# Altium PCB DSV1-002（电池保护板） REV0.2 20230331.PcbDoc (part 2 of 2)
Units mm, origin at the board's own origin, x right, y up, seen from the top; angles counter-clockwise.
Board outline 35.24 x 36.91 mm, 2 copper layers (TOP, BOTTOM), stack 0.264 mm thick; 97 components, 56 nets, 257 pads, 145 vias.
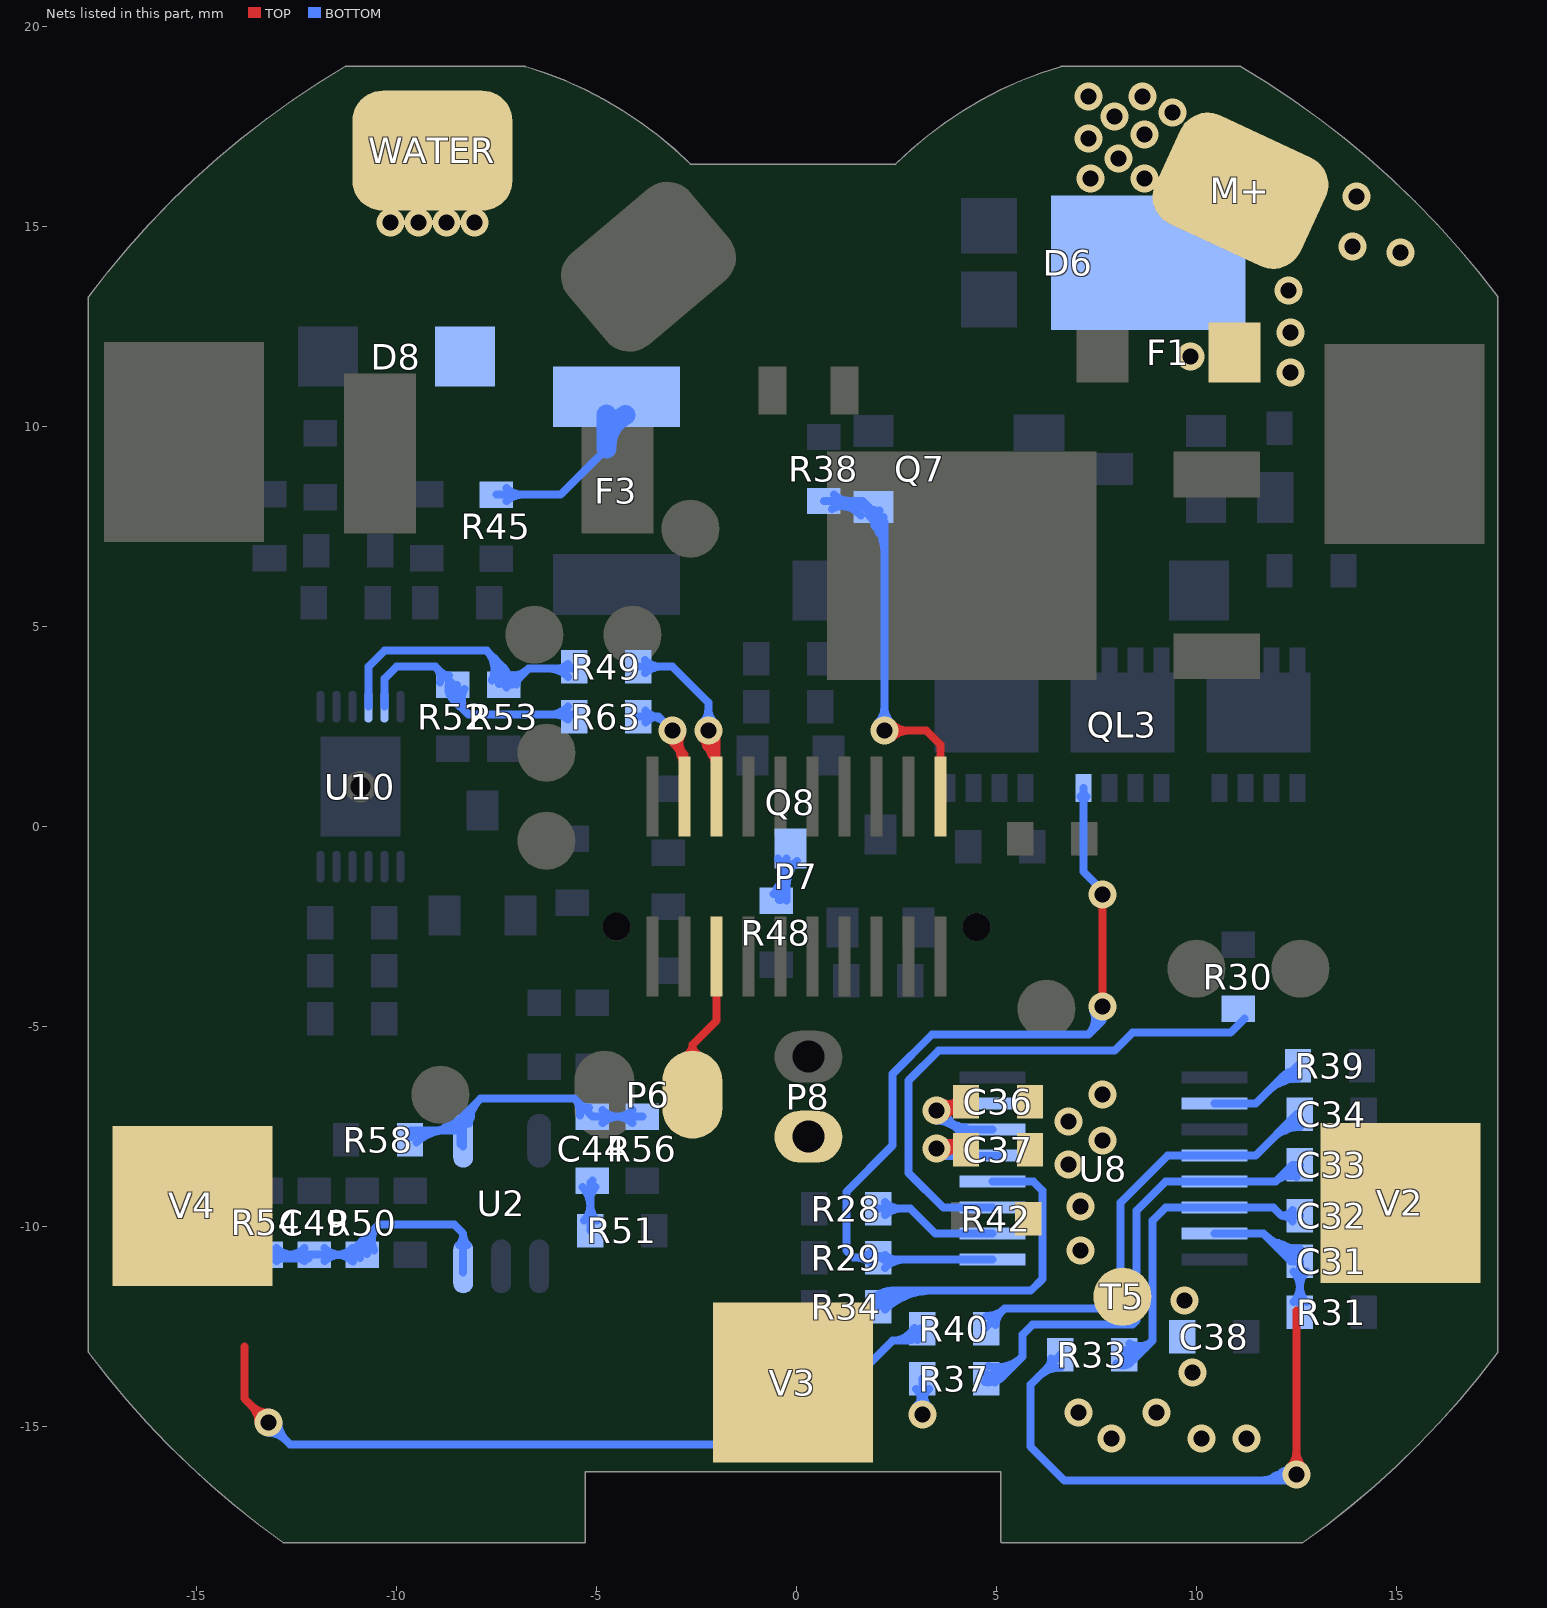
[diagram p2: the nets of this part, all layers, seen from the top]

## Via types
v1: diameter 0.7, hole 0.4, TOP to BOTTOM, tented both sides, 145 vias

## Nets (pads, with @x,y where several pads share a name; then routed paths per layer and width w, separated by ;. In a path a pad name is that pad's centre, name@x,y a point inside that pad or via, vN(x,y) a via of type N, cw(c..) or ccw(c..) an arc to the next point about the centre after c; other vN are vias at no path point) (continued)
N1343729: Q8.3 R48.1 | length 8
  BOTTOM w0.2: -0.463,-1.495 ccw(c-0.245,-1.622) R48.1@-0.393,-1.826 ; Q8.3@-0.46,-0.8 cw(c-1.14,-1.192) -0.381,-1.396 ; -0.359,-1.313 cw(c0.282,-1.484) Q8.3@-0.05,-0.91 ; -0.352,-1.303 ccw(c-0.113,-1.441) R48.1@-0.275,-1.664 ; R48.1@-0.25,-1.85 Q8.3@-0.25,-0.8 ; R48.1@-0.574,-1.687 ccw(c-1.356,-0.905) -0.25,-0.905 cw(c-1.356,-0.905) R48.1@-0.574,-1.687 ; R48.1@-0.432,-1.829 ccw(c-0.873,-1.388) -0.25,-1.388 cw(c-0.873,-1.388) R48.1@-0.432,-1.829 ; Q8.3@-0.412,-0.862 cw(c-0.804,-1.254) -0.25,-1.254 ccw(c-0.804,-1.254) Q8.3@-0.412,-0.862 ; -0.25,-1.495 cw(c0.645,-1.495) 0.012,-0.862 ccw(c0.645,-1.495) -0.25,-1.495
N1459266: C44.1 R56.1 R58.2 U2.4 | length 18.9
  BOTTOM w0.2: R58.2@-9.631,-7.6 -8.4,-7.6 -8.4,-7.929 -8.33,-7.999 -8.33,-7.23 -7.9,-6.8 -5.55,-6.8 ; -8.796,-7.525 cw(c-8.623,-7.826) U2.4@-8.419,-7.545 ; U2.4@-8.305,-7.467 ccw(c-8.492,-7.143) -8.131,-7.24 ; R56.1@-3.85,-7.25 C44.1@-5.1,-7.25 -5.55,-6.8 ; -5.55,-6.8 cw(c-5.888,-7.138) -5.416,-7.213 ccw(c-5.888,-7.138) -5.55,-6.8 ; -4.495,-7.25 cw(c-4.495,-7.806) -4.102,-7.413 ccw(c-4.495,-7.806) -4.495,-7.25 ; -4.495,-7.25 ccw(c-4.495,-6.694) -4.102,-7.087 cw(c-4.495,-6.694) -4.495,-7.25 ; -4.455,-7.25 cw(c-4.455,-6.694) -4.848,-7.087 ccw(c-4.455,-6.694) -4.455,-7.25 ; -4.455,-7.25 ccw(c-4.455,-7.806) -4.848,-7.413 cw(c-4.455,-7.806) -4.455,-7.25 ; R58.2@-9.64,-7.752 cw(c-9.272,-8.121) -9.272,-7.6 ccw(c-9.272,-8.121) R58.2@-9.64,-7.752 ; R58.2@-9.498,-7.894 cw(c-8.789,-8.603) -8.789,-7.6 ccw(c-8.789,-8.603) R58.2@-9.498,-7.894 ; -9.118,-7.6 ccw(c-9.118,-6.636) -8.436,-7.318 cw(c-9.118,-6.636) -9.118,-7.6 ; -8.635,-7.6 ccw(c-8.635,-7.119) -8.295,-7.459 cw(c-8.635,-7.119) -8.635,-7.6 ; U2.4@-8.18,-7.424 cw(c-7.351,-7.424) -7.938,-6.838 ccw(c-7.351,-7.424) U2.4@-8.18,-7.424 ; C44.1@-5.43,-6.92 ccw(c-5.189,-6.679) -5.189,-7.02 cw(c-5.189,-6.679) C44.1@-5.43,-6.92
N1459278: C49.1 R50.2 R54.2 U2.3 | length 24
  BOTTOM w0.2: R54.2@-13.4,-10.8 C49.1@-12.2,-10.8 ; R54.2@-13.25,-10.7 C49.1@-12.05,-10.7 -11,-10.7 -11.2,-10.7 -10.45,-9.95 ; R54.2@-12.939,-10.639 ccw(c-12.787,-10.597) -12.747,-10.749 ; U2.3@-8.33,-11.139 -8.33,-10.17 -8.55,-9.95 -10.1,-9.95 -10.45,-9.95 ; R54.2@-12.998,-10.537 ccw(c-12.605,-10.144) -12.605,-10.7 ; R54.2@-12.998,-10.537 ccw(c-12.364,-9.903) -12.364,-10.8 cw(c-12.364,-9.903) R54.2@-12.998,-10.537 ; R54.2@-12.998,-10.537 ccw(c-12.605,-10.144) -12.605,-10.7 ; -12.695,-10.7 cw(c-12.695,-11.256) -12.302,-10.863 ccw(c-12.695,-11.256) -12.695,-10.7 ; -12.695,-10.7 ccw(c-12.695,-10.144) C49.1@-12.302,-10.537 ; -12.695,-10.7 ccw(c-12.695,-10.144) C49.1@-12.302,-10.537 ; -12.605,-10.7 ccw(c-12.605,-11.256) -12.998,-10.863 cw(c-12.605,-11.256) -12.605,-10.7 ; -12.553,-10.749 ccw(c-12.513,-10.597) C49.1@-12.361,-10.639 ; -12.553,-10.749 ccw(c-12.513,-10.597) C49.1@-12.361,-10.639 ; -12.553,-10.749 ccw(c-12.513,-10.597) C49.1@-12.361,-10.639 ; C49.1@-12.302,-10.537 cw(c-12.936,-9.903) -12.936,-10.8 ccw(c-12.936,-9.903) C49.1@-12.302,-10.537 ; -11.495,-10.7 cw(c-11.495,-11.256) -11.102,-10.863 ccw(c-11.495,-11.256) -11.495,-10.7 ; -11.495,-10.7 ccw(c-11.495,-10.144) -11.102,-10.537 cw(c-11.495,-10.144) -11.495,-10.7 ; -11.405,-10.7 cw(c-11.405,-10.144) -11.798,-10.537 ccw(c-11.405,-10.144) -11.405,-10.7 ; -11.405,-10.7 ccw(c-11.405,-11.256) -11.798,-10.863 cw(c-11.405,-11.256) -11.405,-10.7 ; -10.45,-9.95 ccw(c-10.053,-10.347) -10.555,-10.597 cw(c-10.053,-10.347) -10.45,-9.95 ; -8.33,-10.202 cw(c-8.693,-10.202) -8.436,-10.458 ccw(c-8.693,-10.202) -8.33,-10.202 ; -8.33,-10.202 ccw(c-7.968,-10.202) -8.224,-10.458 cw(c-7.968,-10.202) -8.33,-10.202 ; R50.2@-11.092,-10.865 cw(c-10.839,-10.739) -11.039,-10.539 ccw(c-10.839,-10.739) R50.2@-11.092,-10.865 ; R50.2@-10.913,-10.776 cw(c-10.577,-10.608) -10.843,-10.343 ccw(c-10.577,-10.608) R50.2@-10.913,-10.776 ; R50.2@-10.734,-10.687 cw(c-10.315,-10.477) -10.646,-10.146 ccw(c-10.315,-10.477) R50.2@-10.734,-10.687
N1460629: C44.2 R51.1 | length 4.8
  BOTTOM w0.2: R51.1@-5.15,-10.1 -5.15,-8.9 C44.2@-5.1,-8.85 ; -5.15,-9.455 cw(c-5.706,-9.455) -5.313,-9.848 ccw(c-5.706,-9.455) -5.15,-9.455 ; -5.15,-9.455 ccw(c-4.594,-9.455) -4.987,-9.848 cw(c-4.594,-9.455) -5.15,-9.455 ; C44.2@-5.352,-9.013 cw(c-5.839,-9.5) -5.15,-9.5 ccw(c-5.839,-9.5) C44.2@-5.352,-9.013 ; -5.15,-9.312 cw(c-4.727,-9.312) -5.026,-9.013 ccw(c-4.727,-9.312) -5.15,-9.312
NTC2: P6.2 P7.18 | length 4.9
  TOP w0.2: P6.2@-2.6,-6.45 -2.6,-5.45 ; P7.18@-2,-3.25 -2,-4.85 -2.6,-5.45 ; -2.6,-5.45 cw(c-2.898,-5.45) -2.804,-5.733 ccw(c-2.898,-5.45) -2.6,-5.45 ; -2.6,-5.45 ccw(c-2.302,-5.45) -2.396,-5.733 cw(c-2.302,-5.45) -2.6,-5.45
OUT: D6.2 F1.1 M+.1
  other v1: 12.35,11.35 9.85,11.75 12.35,12.35 12.3,13.4 15.1,14.35 13.9,14.5 14,15.75 7.35,16.2 8.7,16.2 8.05,16.7 7.3,17.2 8.7,17.3 7.95,17.75 9.4,17.85 7.3,18.25 8.65,18.25
"PWM MOTO": P7.1 Q7.1 R38.1 | length 24
  TOP w0.2: v1(2.2,2.4) 3.25,2.4 3.6,2.05 P7.1@3.6,0.75 ; 2.804,2.4 cw(c2.804,3.004) 2.377,2.577 ccw(c2.804,3.004) 2.804,2.4 ; 2.804,2.4 ccw(c2.804,1.796) 2.377,2.223 cw(c2.804,1.796) 2.804,2.4
  BOTTOM w0.2: R38.1@0.685,8.144 1.656,8.144 2.2,7.6 v1(2.2,2.4) ; R38.1@0.889,7.945 cw(c1.15,7.492) 1.286,7.997 ; R38.1@0.973,8.259 ccw(c1.483,8.553) 1.331,7.985 ; 1.97,7.507 cw(c2.225,7.654) Q7.1@2.074,7.908 ; Q7.1@1.986,7.696 cw(c1.961,7.487) 2.143,7.592 cw(c2.237,7.646) Q7.1@2.18,7.738 ; 2.071,7.331 cw(c2.329,7.48) Q7.1@2.177,7.736 ; 1.33,8.144 cw(c1.33,8.7) 0.937,8.307 ccw(c1.33,8.7) 1.33,8.144 ; 1.33,8.144 ccw(c1.33,7.588) 0.937,7.981 cw(c1.33,7.588) 1.33,8.144 ; 2.2,3.004 cw(c1.596,3.004) 2.023,2.577 ccw(c1.596,3.004) 2.2,3.004 ; 2.2,3.004 ccw(c2.804,3.004) 2.377,2.577 cw(c2.804,3.004) 2.2,3.004 ; R38.1@0.737,8.144 cw(c0.737,6.908) 1.611,7.782 ccw(c0.737,6.908) R38.1@0.737,8.144 ; 1.219,8.144 cw(c1.219,7.39) 1.752,7.923 ccw(c1.219,7.39) 1.219,8.144 ; Q7.1@1.811,7.782 cw(c0.871,6.842) 2.2,6.842 ccw(c0.871,6.842) Q7.1@1.811,7.782 ; Q7.1@1.952,7.923 cw(c1.354,7.325) 2.2,7.325 ccw(c1.354,7.325) Q7.1@1.952,7.923
SCL: R52.2 R63.1 U10.11 | length 13.6
  BOTTOM w0.2: U10.11@-10.3,3 -10.3,3.7 -10,4 -9.024,4 ; R63.1@-5.6,2.8 -8.2,2.8 ; -9.024,4 cw(c-9.326,3.698) -8.91,3.604 ccw(c-9.326,3.698) -9.024,4 ; -9.024,4 -8.597,3.572 R52.2@-8.597,3.553 -8.597,3.197 ; -8.597,3.197 cw(c-8.436,3.197) -8.502,3.343 ccw(c-8.436,3.197) -8.597,3.197 ; -8.597,3.197 ccw(c-8.757,3.197) -8.691,3.343 cw(c-8.757,3.197) -8.597,3.197 ; -8.597,3.197 -8.2,2.8 ; -8.2,2.8 cw(c-7.805,3.195) -8.303,3.448 ccw(c-7.805,3.195) -8.2,2.8 ; R52.2@-8.894,3.869 ccw(c-8.686,4.078) -8.686,3.783 cw(c-8.686,4.078) R52.2@-8.894,3.869 ; R52.2@-8.659,3.63 ccw(c-8.321,3.458) -8.589,3.189 cw(c-8.321,3.458) R52.2@-8.659,3.63 ; R52.2@-8.481,3.539 ccw(c-8.063,3.326) -8.395,2.995 cw(c-8.063,3.326) R52.2@-8.481,3.539 ; -6.2,2.8 ccw(c-6.2,3.489) -5.713,3.002 cw(c-6.2,3.489) -6.2,2.8 ; -6.012,2.8 cw(c-6.012,2.377) -5.713,2.676 ccw(c-6.012,2.377) -6.012,2.8
SCL_: P7.9 R63.2 | length 7
  TOP w0.2: v1@-3.1,2.1 -2.8,1.8 ; -2.908,1.817 ccw(c-2.632,1.891) P7.9@-2.775,1.643 ; P7.9@-2.8,0.75 -2.8,1.8 ; -2.8,1.8 cw(c-2.504,2.096) -2.877,2.287 ccw(c-2.504,2.096) -2.8,1.8 ; v1@-3.055,2.377 ccw(c-2.762,2.228) -2.995,1.995 cw(c-2.762,2.228) v1@-3.055,2.377 ; -3.027,2.027 cw(c-3.454,1.6) -2.85,1.6 ccw(c-3.454,1.6) -3.027,2.027
  BOTTOM w0.2: R63.2@-3.95,2.75 -3.45,2.75 ; -3.45,2.7 -3.4,2.7 v1(-3.1,2.4) ; -3.45,2.75 cw(c-3.45,3.178) -3.775,2.9 ccw(c-3.45,3.178) -3.45,2.75 ; -3.45,2.75 ccw(c-3.45,2.322) -3.775,2.6 cw(c-3.45,2.322) -3.45,2.75
SDA: R49.1 R53.2 U10.10 | length 15.5
  BOTTOM w0.2: U10.10@-10.7,3 -10.7,4 -10.3,4.4 -7.742,4.4 ; R49.1@-5.55,3.95 -6.7,3.95 ; -7.742,4.4 cw(c-8.208,3.935) -7.613,3.652 ccw(c-8.208,3.935) -7.742,4.4 ; -7.742,4.4 -7.317,3.974 ; -7.317,3.974 cw(c-7.587,3.974) -7.441,3.747 ccw(c-7.587,3.974) -7.317,3.974 ; -7.317,3.974 ccw(c-7.046,3.974) -7.192,3.747 cw(c-7.046,3.974) -7.317,3.974 ; -7.317,3.974 R53.2@-7.317,3.553 -7.097,3.553 -6.7,3.95 ; -6.7,3.95 cw(c-7.12,4.37) -7.198,3.781 ccw(c-7.12,4.37) -6.7,3.95 ; -7.542,4.2 cw(c-7.936,3.805) -7.433,3.566 ccw(c-7.936,3.805) -7.542,4.2 ; -7.342,3.999 cw(c-7.665,3.676) -7.252,3.48 ccw(c-7.665,3.676) -7.342,3.999 ; R53.2@-6.998,3.553 cw(c-6.757,3.553) -6.927,3.723 ccw(c-6.757,3.553) R53.2@-6.998,3.553 ; -6.2,3.95 cw(c-6.2,3.261) -5.713,3.748 ccw(c-6.2,3.261) -6.2,3.95 ; -6.012,3.95 ccw(c-6.012,4.373) -5.713,4.074 cw(c-6.012,4.373) -6.012,3.95
SDA_: P7.8 R49.2 | length 12.4
  TOP w0.2: -2.234,1.976 cw(c-1.968,2.129) v1@-2.168,2.362 ; v1@-2.229,2.152 cw(c-2.257,1.904) -2.041,2.029 cw(c-1.895,2.113) v1@-2.018,2.229 ; -2.149,1.87 ccw(c-1.788,1.967) P7.8@-1.975,1.643 ; -2.114,1.767 cw(c-1.809,1.943) v1@-2.038,2.21 ; P7.8@-2,0.75 v1@-2,2.2 ; v1@-2.377,2.223 cw(c-3.286,1.314) -2,1.314 ccw(c-3.286,1.314) v1@-2.377,2.223 ; v1@-2.235,2.365 cw(c-2.804,1.796) -2,1.796 ccw(c-2.804,1.796) v1@-2.235,2.365
  BOTTOM w0.2: R49.2@-3.95,4 -3.1,4 -2.2,3.1 v1@-2.2,2.6 ; -3.394,4 cw(c-3.394,4.556) -3.787,4.163 ccw(c-3.394,4.556) -3.394,4 ; -3.394,4 ccw(c-3.394,3.444) -3.787,3.837 cw(c-3.394,3.444) -3.394,4 ; -2.2,2.95 cw(c-2.68,2.95) -2.364,2.588 ccw(c-2.68,2.95) -2.2,2.95 ; -2.2,2.95 ccw(c-1.72,2.95) -2.036,2.588 cw(c-1.72,2.95) -2.2,2.95
  other v1: -2.2,2.4
U8_CCT: C36.1 U8.6 | length 11.3
  TOP w0.2: v1@3.5,-7 C36.1@4.2,-7 ; v1@3.698,-6.948 ccw(c4.002,-6.714) 4.002,-7.097 ccw(c4.002,-7.471) v1@3.701,-7.249 ; C36.1@4.014,-6.911 cw(c3.775,-6.861) 3.838,-7.097 cw(c3.92,-7.402) C36.1@4.105,-7.146 ; v1@3.625,-6.883 ccw(c3.799,-6.582) 3.889,-6.918 ; v1@3.625,-6.883 ccw(c3.799,-6.582) 3.889,-6.918 ; v1@3.625,-6.883 ccw(c3.799,-6.582) 3.889,-6.918 ; C36.1@4.2,-7 ccw(c4.2,-7.625) 3.7,-7.25 cw(c4.2,-7.625) C36.1@4.2,-7 ; v1@3.584,-7 ccw(c3.584,-6.304) 4.076,-6.796 cw(c3.584,-6.304) v1@3.584,-7 ; v1@3.677,-6.923 ccw(c3.862,-6.738) 3.862,-7 cw(c3.862,-6.738) v1@3.677,-6.923 ; v1@3.782,-7 cw(c3.782,-7.415) 4.076,-7.122 ccw(c3.782,-7.415) v1@3.782,-7
  BOTTOM w0.2: v1@3.485,-7.016 4.044,-7.575 ; v1@3.548,-7.086 ccw(c4.089,-6.922) 3.943,-7.468 ; 4.003,-7.467 cw(c3.929,-7.743) U8.6@4.177,-7.6 ; U8.6@4.895,-7.575 4.044,-7.575 ; 4.044,-7.575 ccw(c3.501,-8.118) 3.5,-7.35 cw(c3.501,-8.118) 4.044,-7.575 ; v1@3.75,-7.1 ccw(c4.187,-7.1) 3.878,-7.409 cw(c4.187,-7.1) v1@3.75,-7.1 ; 3.834,-7.365 ccw(c4.22,-6.979) 4.22,-7.525 cw(c4.22,-6.979) 3.834,-7.365
  other v1: 3.5,-7.1
U8_CDT: C37.1 U8.5 | length 13.2
  TOP w0.2: v1@3.5,-8 C37.1@4.3,-8 ; v1@3.776,-7.911 cw(c3.776,-8.188) C37.1@4.029,-8.075 ; 3.852,-7.911 ccw(c3.852,-7.594) C37.1@4.076,-7.818 ; v1@3.65,-7.85 ccw(c3.873,-7.552) C37.1@3.969,-7.911 ; v1@3.65,-7.85 ccw(c3.873,-7.552) C37.1@3.969,-7.911 ; v1@3.65,-7.85 ccw(c3.873,-7.552) C37.1@3.969,-7.911 ; v1@3.737,-8.129 cw(c4.056,-8.236) C37.1@3.969,-7.911 ; v1@3.737,-8.129 cw(c4.056,-8.236) C37.1@3.969,-7.911 ; v1@3.737,-8.129 cw(c4.056,-8.236) C37.1@3.969,-7.911 ; C37.1@4.076,-7.818 cw(c3.638,-7.38) 3.638,-8 ccw(c3.638,-7.38) C37.1@4.076,-7.818 ; v1@3.677,-8.227 cw(c4.224,-8.774) 4.224,-8 ccw(c4.224,-8.774) v1@3.677,-8.227 ; v1@3.677,-7.873 ccw(c3.983,-7.567) 3.983,-8 cw(c3.983,-7.567) v1@3.677,-7.873 ; v1@3.729,-8 cw(c3.729,-8.491) 4.076,-8.144 ccw(c3.729,-8.491) v1@3.729,-8
  BOTTOM w0.2: v1@3.5,-8 3.728,-8.228 U8.5@5.04,-8.228 ; v1@3.54,-8.08 cw(c3.765,-8.247) 3.904,-8.005 ; v1@3.689,-8.214 cw(c3.778,-8.292) 3.838,-8.189 cw(c3.926,-8.037) v1@3.75,-8.042 ; v1@3.701,-8.199 cw(c3.946,-8.382) U8.5@4.099,-8.117 ; 3.941,-8.069 cw(c3.841,-8.444) U8.5@4.177,-8.25 ; v1@3.535,-8.015 ccw(c4.05,-7.5) 4.05,-8.228 cw(c4.05,-7.5) v1@3.535,-8.015 ; v1@3.677,-7.873 ccw(c4.533,-7.017) 4.533,-8.228 cw(c4.533,-7.017) v1@3.677,-7.873
  other v1: 3.5,-8.05
U8_COP: QL3.G R29.2 U8.1 | length 23.7
  TOP w0.2: v1@7.65,-4.45 v1(7.65,-1.7)
  BOTTOM w0.2: R29.2@1.887,-10.938 ccw(c1.494,-11.331) 1.494,-10.775 ccw(c1.494,-10.219) R29.2@1.887,-10.612 ; R29.2@2.05,-10.775 1.425,-10.775 1.25,-10.6 1.25,-9.126 2.404,-7.972 2.404,-6.18 3.384,-5.2 7.3,-5.2 ; R29.2@2.087,-10.737 2.175,-10.825 U8.1@4.895,-10.825 ; R29.2@2.213,-11.027 cw(c2.7,-11.514) 2.7,-10.825 ; R29.2@2.213,-10.701 ccw(c2.512,-10.402) 2.512,-10.825 ; QL3.G@7.104,0.753 cw(c6.934,0.583) 7.175,0.583 cw(c7.416,0.583) QL3.G@7.246,0.753 ; QL3.G@7.175,0.974 7.175,-1.125 7.65,-1.6 v1(7.65,-1.7) ; v1@7.419,-4.596 cw(c6.909,-4.809) 7.3,-5.2 ; 7.511,-4.989 ccw(c7.207,-4.685) v1@7.604,-4.519 ; v1(7.65,-4.5) 7.65,-4.85 7.3,-5.2
U8_DOP: R30.2 U8.3 | length 13.8
  BOTTOM w0.2: U8.3@4.895,-9.525 3.675,-9.525 2.804,-8.654 2.804,-6.346 3.55,-5.6 7.95,-5.6 8.4,-5.15 10.85,-5.15 R30.2@11.2,-4.8
U8_SEL: R39.1 U8.10 | length 6.1
  BOTTOM w0.2: U8.10@10.445,-6.925 11.475,-6.925 12.15,-6.25 ; 12.068,-6.415 ccw(c11.89,-5.751) R39.1@12.512,-6.046 ; R39.1@12.539,-5.97 12.259,-6.25 12.15,-6.25 ; 12.15,-6.25 cw(c12.279,-6.379) 12.394,-6.237 ccw(c12.279,-6.379) 12.15,-6.25 ; 11.808,-6.592 cw(c12.539,-7.323) 12.539,-6.289 ccw(c12.539,-7.323) 11.808,-6.592 ; 12.15,-6.25 cw(c12.539,-6.64) 12.539,-6.089 ccw(c12.539,-6.64) 12.15,-6.25
U8_VC1: C31.2 R31.1 U8.15 | length 11.8
  BOTTOM w0.2: U8.15@10.445,-10.175 11.676,-10.175 ; 12.052,-10.409 cw(c11.84,-11.213) C31.2@12.559,-10.794 ; C31.2@12.366,-10.85 ccw(c12.05,-10.951) 12.134,-10.63 ccw(c12.244,-10.216) C31.2@12.466,-10.582 ; R31.1@12.585,-12.138 C31.2@12.585,-10.868 12.369,-10.868 11.676,-10.175 ; 11.676,-10.175 ccw(c12.579,-9.272) 12.584,-10.549 cw(c12.579,-9.272) 11.676,-10.175 ; 12.585,-11.513 cw(c13.141,-11.513) 12.748,-11.12 ccw(c13.141,-11.513) 12.585,-11.513 ; 12.585,-11.513 ccw(c12.029,-11.513) 12.422,-11.12 cw(c12.029,-11.513) 12.585,-11.513 ; 12.585,-11.493 cw(c12.029,-11.493) 12.422,-11.886 ccw(c12.029,-11.493) 12.585,-11.493 ; 12.585,-11.493 ccw(c13.141,-11.493) 12.748,-11.886 cw(c13.141,-11.493) 12.585,-11.493 ; 12.015,-10.514 ccw(c12.582,-9.948) 12.585,-10.749 cw(c12.582,-9.948) 12.015,-10.514
U8_VC2: C32.2 R33.1 U8.14 | length 10.9
  BOTTOM w0.2: R33.1@8.004,-13.425 ccw(c8.159,-13.176) R33.1@8.367,-13.383 ; R33.1@8.11,-13.255 ccw(c8.296,-12.957) 8.544,-13.206 ; R33.1@8.216,-13.085 ccw(c8.433,-12.738) 8.722,-13.028 ; R33.1@8.322,-12.916 ccw(c8.57,-12.52) 8.9,-12.85 ; R33.1@8.4,-13.35 8.9,-12.85 8.9,-9.85 9.225,-9.525 U8.14@10.445,-9.525 11.925,-9.525 12.125,-9.725 ; C32.2@12.585,-9.725 12.125,-9.725 ; 12.125,-9.725 cw(c12.125,-10.069) 12.401,-9.863 ccw(c12.125,-10.069) 12.125,-9.725 ; 12.125,-9.725 ccw(c12.125,-9.381) 12.401,-9.587 cw(c12.125,-9.381) 12.125,-9.725
U8_VC3: C33.2 R37.1 U8.13 | length 16.4
  BOTTOM w0.2: R37.1@4.71,-13.876 ccw(c4.819,-13.426) 5.146,-13.754 ; R37.1@4.75,-13.8 5.1,-13.8 ; R37.1@4.757,-13.682 ccw(c4.917,-13.021) 5.398,-13.502 ; R37.1@4.804,-13.487 ccw(c5.016,-12.616) 5.65,-13.25 ; R37.1@4.961,-13.891 cw(c5.1,-13.951) 5.1,-13.8 ; R37.1@4.961,-13.709 ccw(c5.1,-13.649) 5.1,-13.8 ; C33.2@12.585,-8.455 12.398,-8.455 11.978,-8.875 ; 5.1,-13.8 5.65,-13.25 ; 5.65,-13.25 5.65,-12.7 5.9,-12.45 8.4,-12.45 8.5,-12.35 8.5,-9.6 9.225,-8.875 U8.13@10.445,-8.875 11.978,-8.875 ; 11.978,-8.875 cw(c12.331,-9.228) 12.505,-8.76 ccw(c12.331,-9.228) 11.978,-8.875 ; 12.199,-8.654 cw(c12.451,-8.906) 12.575,-8.572 ccw(c12.451,-8.906) 12.199,-8.654
U8_VC4: C34.2 R40.1 U8.12 | length 15
  BOTTOM w0.2: R40.1@4.7,-12.55 5.2,-12.05 ; R40.1@4.754,-12.231 ccw(c4.763,-11.613) 5.2,-12.05 ; R40.1@4.98,-12.461 cw(c5.442,-12.461) 5.115,-12.135 ; 12.141,-7.623 ccw(c11.978,-7.014) C34.2@12.557,-7.262 ; C34.2@12.515,-7.185 11.475,-8.225 U8.12@10.445,-8.225 9.275,-8.225 8.1,-9.4 8.1,-11.75 7.8,-12.05 5.2,-12.05 ; 11.921,-7.779 cw(c12.585,-8.443) 12.585,-7.504 ccw(c12.585,-8.443) 11.921,-7.779 ; C34.2@12.262,-7.438 cw(c12.585,-7.761) 12.585,-7.304 ccw(c12.585,-7.761) C34.2@12.262,-7.438
U8_VMP: R28.2 U8.2 | length 4
  BOTTOM w0.2: R28.2@2.05,-9.55 2.85,-9.55 3.475,-10.175 U8.2@4.895,-10.175 ; R28.2@2.213,-9.713 cw(c2.606,-10.106) 2.606,-9.55 cw(c2.606,-8.994) R28.2@2.213,-9.387
U8_VNIN: R34.2 U8.4 | length 12.5
  BOTTOM w0.2: R34.2@1.93,-11.791 cw(c2.391,-12.252) 2.391,-11.6 ; R34.2@2.05,-12 2.45,-11.6 ; R34.2@2.05,-11.95 2.4,-11.6 ; R34.2@2.071,-11.932 cw(c2.874,-12.735) 2.874,-11.6 ; R34.2@2.101,-11.687 ccw(c2.172,-11.372) 2.4,-11.6 ; R34.2@2.111,-11.689 ccw(c2.204,-11.354) 2.45,-11.6 ; R34.2@2.213,-12.074 cw(c3.357,-13.218) 3.357,-11.6 ; R34.2@2.28,-11.911 cw(c2.621,-11.911) R34.2@2.38,-11.67 ; R34.2@2.28,-11.904 cw(c2.69,-11.89) 2.4,-11.6 ; U8.4@4.895,-8.875 5.925,-8.875 6.15,-9.1 6.15,-11.306 5.856,-11.6 2.45,-11.6 ; 2.4,-11.6 2.45,-11.6
U8_VSS: C36.2 C37.2 C38.2 P8.1 R42.1 T5.1 U8.7
  other v1: 7.875,-15.3 10.125,-15.3 11.25,-15.3 7.05,-14.65 9,-14.65 9.9,-13.65 9.7,-11.85 7.1,-10.6 7.1,-9.5 6.8,-8.45 7.65,-7.85 6.8,-7.375 7.65,-6.7
V2: R33.2 V2.1 | length 20.1
  TOP w0.2: v1(12.5,-16.2) 12.5,-12.1 ; 12.5,-15.596 cw(c11.896,-15.596) 12.323,-16.023 ccw(c11.896,-15.596) 12.5,-15.596 ; 12.5,-15.596 ccw(c13.104,-15.596) 12.677,-16.023 cw(c13.104,-15.596) 12.5,-15.596
  BOTTOM w0.2: 6.055,-13.745 cw(c6.6,-14.289) R33.2@6.6,-13.519 ; R33.2@6.27,-13.53 ccw(c6.029,-13.289) R33.2@6.37,-13.289 ; R33.2@6.6,-13.2 5.85,-13.95 5.85,-15.5 6.7,-16.35 12.35,-16.35 v1(12.5,-16.2) ; 11.944,-16.242 cw(c12.07,-16.461) v1@12.286,-16.33 ; 12.121,-16.14 cw(c12.245,-16.355) v1@12.457,-16.226 ; 11.534,-16.35 ccw(c11.534,-15.234) 12.323,-16.023 cw(c11.534,-15.234) 11.534,-16.35 ; 12.017,-16.35 ccw(c12.017,-15.717) 12.465,-16.165 cw(c12.017,-15.717) 12.017,-16.35
V3: R37.2 V3.1 | length 3.7
  BOTTOM w0.2: v1@2.973,-14.523 ccw(c2.546,-14.096) 3.15,-14.096 ccw(c3.754,-14.096) v1@3.327,-14.523 ; R37.2@2.987,-14.052 cw(c2.594,-14.445) 3.15,-14.445 cw(c3.706,-14.445) R37.2@3.313,-14.052 ; v1@3.021,-14.486 ccw(c2.925,-14.326) 3.105,-14.277 ccw(c3.415,-14.194) v1@3.266,-14.479 ; v1@3.034,-14.479 ccw(c2.885,-14.194) 3.195,-14.277 ccw(c3.375,-14.326) v1@3.279,-14.486 ; v1(3.15,-14.7) R37.2@3.15,-13.8
V4: R40.2 V4.1 | length 25.2
  TOP w0.2: -13.8,-13 -13.8,-14.3 v1(-13.2,-14.9) ; -13.627,-14.473 cw(c-14.054,-14.9) -13.45,-14.9 ccw(c-14.054,-14.9) -13.627,-14.473 ; -13.627,-14.473 ccw(c-13.2,-14.046) -13.2,-14.65 cw(c-13.2,-14.046) -13.627,-14.473
  BOTTOM w0.2: v1(-13.2,-14.9) -12.66,-15.44 -0.19,-15.44 2.4,-12.85 ; 2.74,-12.85 ccw(c2.74,-12.411) R40.2@3.124,-12.624 ; R40.2@2.855,-12.795 ccw(c2.699,-12.639) R40.2@2.92,-12.639 ; R40.2@2.949,-12.527 cw(c2.4,-12.222) 2.4,-12.85 ; R40.2@3.02,-12.829 ccw(c2.923,-12.973) 2.8,-12.85 ; R40.2@3.1,-12.55 2.8,-12.85 ; -12.773,-15.327 cw(c-12.346,-14.9) -12.95,-14.9 ccw(c-12.346,-14.9) -12.773,-15.327 ; -12.773,-15.327 ccw(c-13.2,-15.754) -13.2,-15.15 cw(c-13.2,-15.754) -12.773,-15.327 ; 2.4,-12.85 2.8,-12.85
WATER: D8.2 F3.2 R45.1 WATER.1 | length 7.7
  BOTTOM w0.2: R45.1@-7.5,8.3 -5.9,8.3 -4.75,9.45 ; -6.855,8.3 cw(c-6.855,8.856) -7.248,8.463 ccw(c-6.855,8.856) -6.855,8.3 ; -6.855,8.3 ccw(c-6.855,7.744) -7.248,8.137 cw(c-6.855,7.744) -6.855,8.3
  BOTTOM w0.5: -4.75,9.45 F3.2@-4.75,10.3 ; -4.75,9.524 cw(c-3.896,9.524) -4.274,10.29 ccw(c-3.896,9.524) -4.75,9.524
  other v1: -10.15,15.1 -9.45,15.1 -8.75,15.1 -8.05,15.1
pads on no net: "P7. " P7.3 U8.8 U8.9 U10.2 U10.5 U10.12

## Polygon pours and split planes (outlines as drawn)
V2 on TOP "TOP-N470898" (solid, pour order 62): 17.4,-6.1 17.4,-12.6 16.884,-13.116 12.516,-13.116 12.133,-12.733 12.133,-5.917 12.55,-5.5 16.8,-5.5
B- on TOP "Top Layer-No Net" (solid, remove dead copper, pour order 50): -6.9,-8.35 -6.9,-4.8 -3.9,-4.8 -3.9,-8.35
U8_VSS on TOP "Top Layer-No Net" (solid, remove dead copper, pour order 65): 11.3,-17.6 11.7,-17.2 11.7,-6 11.2,-5.5 3.4,-5.5 2.6,-6.3 2.6,-8.5 3.1,-9 5,-9 5.3,-9.3 5.3,-15.4 5.6,-15.7 5.6,-17.3 5.9,-17.6
B- on TOP "Top Layer-No Net" (solid, remove dead copper, pour order 41): -12.1,2 -9.85,2 -9.85,-0.128 -9.869,-0.15 -12.1,-0.15
B- on TOP "Top Layer-No Net" (solid, remove dead copper, pour order 54): -15.3,17.6 -12.5,17.6 -12.2,17.3 -12.2,14.9 -11.8,14.5 -8.6,14.5 -8.3,14.2 -8.3,7 -8.6,6.7 -17.3,6.7 -17.7,7.1 -17.7,15.5 -15.6,17.6
V4 on TOP "TOP-N470898" (solid, pour order 61): -17.4,-5.97 -17.4,-12.67 -16.884,-13.186 -12.716,-13.186 -12.133,-12.603 -12.133,-5.937 -12.674,-5.396 -16.826,-5.396
WATER on TOP "TOP-WATER" (solid, pour order 57): -12.1,18.2 -11.596,18.704 -6.504,18.704 -6.2,18.4 -6.2,14.951 -6.477,14.674 -11.757,14.674 -12.1,15.017
B+ on TOP "Top Layer-No Net" (solid, remove dead copper, pour order 43): 9.2,7 9,7.2 9,9.6 9.2,9.8 13.9,9.8 14.1,9.6 14.1,7.2 13.9,7
B+ on TOP "Top Layer-No Net" (solid, remove dead copper, pour order 38): 12,6.7 11.5,7.2 12.55,9.7 13.1,10.25 13.1,12.9 13.4,13.2 17.1,13.2 17.4,12.9 17.4,3.95 16.95,3.5 12.25,3.5 12,3.7
OUT on TOP "Top Layer-No Net" (solid, remove dead copper, pour order 40): 12.55,10 12.9,10.35 12.9,12.7 13.5,13.3 16.5,13.3 16.75,13.55 16.75,15.45 13.05,19.15 7.5,19.15 6.8,18.45 6.8,16.05 9.35,13.5 9.35,10.25 9.6,10
B- on TOP "Top Layer-No Net" (solid, remove dead copper, pour order 74): -6.1,-12.2 -6.1,-8 -2.05,-8 -1.6,-7.55 -1.6,-5.3 -1.45,-5.15 -1.15,-5.15 -1,-5.3 -1,-8.1 -0.8,-8.328 -0.45,-8.75 2.55,-8.75 3,-9.2 4.6,-9.2 4.9,-9.5 4.9,-11 4.5,-11.4 -3.9,-11.4 -4.7,-12.2
U8_VSS on TOP "Top Layer-No Net" (solid, remove dead copper, pour order 44): 3.35,-5.9 2.3,-5.9 1.7,-6.5 1.7,-7.45 1.45,-7.45 1.45,-7.1 1.25,-6.9 -0.6,-6.9 -0.8,-7.1 -0.8,-8.35 -0.6,-8.55 1.25,-8.55 1.45,-8.35 1.45,-7.8 1.7,-7.8 1.7,-8.35 1.9,-8.55 2.65,-8.55 3.1,-9
B+ on TOP "Top Layer-No Net" (solid, remove dead copper, pour order 53): 15.05,3.5 15.95,3.5 16.35,3.1 16.35,-4.8 16.65,-5.1 17.15,-5.1 17.4,-4.85 17.4,5.5 15.05,5.5
CH+ on TOP "Top Layer-No Net" (solid, pour order 56): -1.4,-1.65 -0.75,-1 6.6,-1 7.45,-1.85 7.45,-4.35 6.65,-5.15 5.4,-5.15 5,-4.752 5,-2.45 4.5,-1.95 1.6,-1.95 1.4,-2.15 1.4,-2.3 -1.4,-2.3
MOTO+ on TOP "Top Layer-No Net" (solid, remove dead copper, pour order 45): 3.3,3 4.15,2.15 4.15,0.8 4.55,0.4 7.6,0.4 7.7,0.3 7.7,-0.2 7.2,-0.2 7.2,-0.5 7.7,-0.5 7.7,-1 7.3,-1.4 7.3,-4.65 7.8,-5.15 15.75,-5.15 16.1,-4.8 16.1,2.95 15.85,3.2 9.05,3.2 8.75,3.5 8.75,9.65 9.15,10.05 9.15,13.5 6.6,16.05 6.6,18.25 6.4,18.45 4.883,18.45 4.65,18.1 2.1,15.726 2.1,10.2 1.85,9.95 0.5,9.95 0.5,11.4 0.4,11.5 0.15,11.5 0.05,11.4 0.05,9.95 -0.3,9.95 -0.5,9.75 -0.5,4.05 0.55,3
BAT_GND on TOP "Top Layer-No Net" (solid, remove dead copper, pour order 47): -5.8,18.2 -6.5,17.5 -6.5,15.8 -8.1,14.2 -8.1,7 -7.8,6.7 -1.2,6.7 -0.7,7.2 -0.7,9.55 -1.3,10.15 -1.3,11.6 -1.15,11.75 1,11.75 1,10.6 1.45,10.6 1.45,11.75 1.85,11.75 1.85,15.95 1.215,16.585 0,16.9 -3,18.2
B- on TOP "Top Layer-No Net" (solid, remove dead copper, pour order 73): -12.3,7.35 -12.3,6.3 -17.1,6.3 -17.4,6 -17.4,1.7 -9.85,1.7 -9.85,0.1 -11.8,0.1 -11.8,1.7 -17.4,1.7 -17.4,-4.4 -16.9,-4.9 -12.5,-4.9 -11.7,-5.7 -11.7,-12.9 -12.4,-13.6 -15.8,-13.6 -16.1,-13.9 -16.1,-15.3 -13.463,-17.937 -5.9,-17.8 -5.5,-17.4 -5.5,-15.814 -4.714,-15.814 -4.4,-15.5 -4.4,-8.95 -5.75,-7.6 -5.75,-5.85 -5.25,-5.35 -4.25,-5.35 -4,-5.1 -4,-2 -2,-2 -1.7,-1.7 -1.7,-0.7 -1.9,-0.5 -4,-0.5 -4.1,0.2 -4.1,2.3 -3.05,3.35 -3.05,6.05 -3.6,6.6 -7.907,6.6 -8.303,6.997
BAT_GND on TOP "Top Layer-No Net" (solid, remove dead copper, pour order 66): -4.4,6.7 -3.45,6.7 -2.9,6.15 -2.9,3.9 -1.4,2.4 -1.4,1.7 1.4,1.7 1.4,2.6 1.2,2.8 0.55,2.8 -0.65,4 -0.65,8.064
U8_VSS on BOTTOM "Top Layer-No Net" (solid, remove dead copper, pour order 67): 4.106,-6.75 5.906,-6.75 6.006,-6.65 6.006,-6.05 6.206,-5.85 8.406,-5.85 8.706,-6.15 8.706,-8.25 7.806,-9.15 7.806,-11.45 7.606,-11.65 6.7,-11.65 6.45,-11.4 6.45,-8.95 6.006,-8.506 6.006,-7.25 5.906,-7.15 4.106,-7.15
B+ on BOTTOM "Top Layer-No Net" (solid, remove dead copper, pour order 68): 14.7,-12.4 14.7,-12.7 14.6,-12.8 13.5,-12.8 13.5,-4.8 13.2,-4.8 13.2,-12.8 11.9,-12.8 11.8,-12.7 11.8,-11 11.35,-10.55 9.6,-10.55 9.6,-11.15 10.5,-11.15 10.6,-11.25 10.6,-14.2 11,-14.6 16.3,-14.6 17.4,-13.5 17.4,-12.8
B- on BOTTOM "Top Layer-No Net" (solid, remove dead copper, pour order 72): -14.1,-12.05 -14.1,-13.9 -12.5,-15.5 -6.1,-15.5 -5.5,-16.1 -5.5,-17.4 -5.9,-17.8 -13.2,-17.8 -17.333,-13.667
B+ on BOTTOM "Top Layer-No Net" (solid, remove dead copper, pour order 64): 14.8,7 13.3,7 13.1,6.8 13.1,5.9 13.3,5.7 14.9,5.7
B+ on BOTTOM "Top Layer-No Net" (solid, remove dead copper, pour order 63): 13.3,7.2 14.8,7.2 14.8,9.1 14.7,9.2 13.3,9.2 13.1,9 13.1,7.445 13.1,7.4 13.3,7.2
B+ on BOTTOM "Top Layer-No Net" (solid, remove dead copper, pour order 60): 13.1,10.4 14.7,10.4 14.9,10.2 14.9,9.4 13.4,9.4 13.3,9.4 13.1,9.6 13.1,10.2 13.3,10.4
B- on BOTTOM "Top Layer-No Net" (solid, remove dead copper, pour order 70): -12.748,-5.5 -9.8,-5.5 -9.7,-5.4 -9.7,-4.7 -8.9,-3.9 -4.9,-3.9 -4.6,-4.2 -4.6,-5.8 -5.35,-6.55 -10.35,-6.55 -10.7,-6.9 -12.188,-6.9 -12.589,-6.5
OUT on BOTTOM "Top Layer-No Net" (solid, remove dead copper, pour order 58): 6.45,10.75 6.15,11.05 6.15,18.15 6.75,18.75 13.3,18.75 17.5,14.55 17.5,11.3 16.95,10.75
BAT_GND on BOTTOM "Top Layer-No Net" (solid, remove dead copper, pour order 48): -6.3,10.7 -7.9,12.3 -7.9,15.8 -13.3,15.8 -13.7,16.2 -13.7,16.877 -11.9,18.7 5.2,18.7 5.85,18.05 5.85,11.1 5.45,10.7
B- on BOTTOM "Top Layer-No Net" (solid, remove dead copper, pour order 71): -13.85,-11.35 -10.3,-11.35 -10.15,-11.2 -10.15,-10.45 -10.05,-10.35 -9.15,-10.35 -9,-10.5 -9,-11.75 -8.8,-11.95 -7.9,-11.95 -7.7,-11.75 -7.7,-10.45 -7.55,-10.3 -7.2,-10.3 -7.05,-10.45 -7.05,-11.75 -6.85,-11.95 -6.1,-11.95 -5.5,-11.35 -3.55,-11.35 -3,-10.8 -3,-6.8 -3.35,-6.45 -4.9,-6.45 -4.9,-4.75 -3.9,-4.75 -3.45,-4.3 -2.3,-4.3 -1.35,-5.25 -1.35,-8.7 -0.7,-9.35 -0.7,-14.6 -1.15,-15.05 -12.35,-15.05 -12.65,-14.75 -14.65,-14.75 -16.4,-13 -14.44,-10.76
CH+ on BOTTOM "Top Layer-No Net" (solid, remove dead copper, pour order 46): 7,-0.45 7.35,-0.45 7.65,-0.15 7.65,1.3 9.35,1.3 9.45,1.2 9.45,-3.65 9.15,-3.95 5.7,-3.95 5.7,0.35 6.367,0.183
B+ on BOTTOM "Top Layer-No Net" (solid, remove dead copper, pour order 59): 11.9,-5 12.1,-5.2 14.5,-5.2 14.7,-5.4 14.7,-5.8 14.2,-5.8 14.2,-6.1 14.7,-6.1 14.7,-7 14.2,-7 14.2,-7.3 14.7,-7.3 14.7,-8.3 14.2,-8.3 14.2,-8.6 14.7,-8.6 14.7,-9.6 14.2,-9.6 14.2,-9.9 14.7,-9.9 14.7,-10.7 14.2,-10.7 14.2,-11 14.7,-11 14.7,-12 14.2,-12 14.2,-12.3 14.7,-12.3 14.7,-12.8 17.4,-12.8 17.4,9.95 16.95,10.4 14.5,10.4 14.5,5.5 13.5,5.5 13.35,5.35 13.35,0.5 13.1,0.25 11.9,0.25
CH+ on BOTTOM "Top Layer-No Net" (solid, pour order 52): 6.7,-3.9 6.65,-3.95 5.65,-3.95 5,-3.3 5,-1.5 5.4,-1.1 5.4,-0.05 5.2,0.15 4.4,0.15 4.25,0.3 4.25,1.3 6.4,1.3 6.7,1
B+ on BOTTOM "Top Layer-No Net" (solid, remove dead copper, pour order 49): 11.05,1.3 13.25,1.3 13.5,1.55 13.5,-0.8 12.05,-2.25 11.95,-2.25 11.05,-1.35
B- on BOTTOM "Top Layer-No Net" (solid, remove dead copper, pour order 55): -14.6,16.1 -17.5,13.2 -17.5,-13.9 -16.8,-14.6 -13.95,-11.915 -13.95,-7.8 -15.3,-6.45 -15.3,8.8 -14.5,9.6 -13,9.6 -12.6,10 -12.6,10.5 -12.25,10.85 -9.95,10.85 -9.7,11.1 -9.7,14.1 -10,14.4 -10.45,14.4 -10.65,14.6 -10.65,15.3 -11.45,16.1
WATER on BOTTOM "Top Layer-No Net" (solid, remove dead copper, pour order 51): -7.8,15.7 -7.5,15.4 -7.5,12.3 -6.7,11.5 -4.05,11.5 -4.05,10 -6.85,10 -7.7,10.85 -9.25,10.85 -9.55,11.15 -9.55,14.2 -9.85,14.5 -10.35,14.5 -10.6,14.75 -10.6,15.45 -10.35,15.7
B- on BOTTOM "Top Layer-No Net" (solid, remove dead copper, pour order 69): -14.5,-6.3 -14.5,8.5 -14.3,8.7 -14,8.7 -13.8,8.5 -13.8,6.2 -13.7,6.1 -13.4,6.1 -13.4,6.8 -13,6.8 -13,6.1 -12.7,6.1 -12.6,6 -12.6,4.7 -12.3,4.4 -12.3,1.5 -10.3,1.5 -10.3,2 -9.6,2 -9.4,1.8 -9.4,1.3 -9,1.3 -8.75,1.05 -8.75,0.2 -9.05,-0.1 -10.3,-0.1 -10.3,0.4 -12.3,0.4 -12.3,-1.4 -12,-1.4 -12,-0.9 -11.8,-0.9 -11.8,-2.1 -12.1,-2.1 -12.1,-1.7 -12.4,-1.7 -12.5,-1.8 -12.5,-2 -11.9,-2 -11.9,-2.8 -12.5,-2.8 -12.5,-3.5 -11.9,-3.5 -11.9,-3.8 -12.5,-3.8 -12.5,-4.6 -11.9,-4.6 -11.9,-4.9 -12.5,-4.9 -12.5,-5.3 -12.1,-5.7 -12.1,-6.9 -13.9,-6.9
B- on BOTTOM "Top Layer-No Net 1" (solid, pour order 39): -4.952,-2.929 -4.802,-2.779 -4.8,-1.6 -4.95,-1.45 -7.8,-1.45 -7.999,-1.649 -8,-2.7 -7.771,-2.929
+3.3V on BOTTOM "Top Layer-No Net 1" (solid, pour order 42): -10.5,-1.9 -9.6,-1.9 -9.35,-1.65 -9.15,-1.45 -8.4,-1.45 -8.2,-1.65 -8.2,-2.3 -8.2,-3.05 -8.35,-3.2 -9.3,-3.2 -9.6,-2.9

## Keep-outs
Keep-Out Layer:
  circle w0.1: c137.644,-16.637 r1
  circle w0.1: c137.653,125.879 r1
  circle w0.1: c26.99,125.879 r1
  circle w0.1: c26.981,-16.637 r1
  lines w0.1: -17.61,-13.188 -17.61,13.187 ; -17.61,-13.188 ccw(c0,-0.001) -12.74,-17.937 -5.202,-17.937 -5.202,-16.171 5.198,-16.171 5.198,-17.937 12.738,-17.937 ; -17.61,13.187 cw(c0,0) -11.19,18.942 -6.696,18.942 ; -6.697,18.942 cw(c-9.5,9.499) -2.571,16.5 ; -2.571,16.499 2.569,16.499 ; 2.569,16.5 cw(c9.498,9.499) 6.695,18.942 ; 6.694,18.942 11.188,18.942 cw(c-0.002,0) 17.608,13.187 17.608,-13.188 cw(c-0.002,-0.001) 12.738,-17.937 ; 24.481,124.9 24.481,128.379 29.6,128.379 ; 29.49,-19.137 29.49,-14.388 ; 29.49,48.866 29.49,22.491 ; 29.49,122.6 29.49,128.379 ; 34.36,54.621 41.898,54.621 41.898,56.387 52.298,56.387 52.298,54.621 59.838,54.621 ccw(c47.098,72.557) 64.708,59.37 64.708,85.745 ccw(c47.098,72.558) 58.287,91.499 53.794,91.5 ; 34.36,17.742 41.898,17.742 41.898,19.508 52.298,19.508 52.298,17.742 59.838,17.742 ; 34.36,17.742 cw(c47.1,35.678) 29.49,22.491 ; 34.36,54.621 cw(c47.1,72.557) 29.49,59.37 ; 35.91,17.742 ccw(c47.1,-1.2) 29.49,11.987 ; 35.91,17.742 40.404,17.742 ; 40.403,17.742 cw(c37.6,8.299) 44.529,15.3 ; 40.403,54.621 cw(c37.6,45.178) 44.529,52.179 ; 40.403,91.499 cw(c37.6,82.057) 44.529,89.058 ; 40.404,54.621 35.91,54.621 ccw(c47.1,35.679) 29.49,48.866 29.49,59.37 ; 40.404,91.5 35.91,91.5 ccw(c47.1,72.558) 29.49,85.745 ; 44.529,125.936 49.669,125.936 ; 44.528,125.936 ccw(c37.6,118.936) 40.402,128.378 35.91,128.379 ccw(c47.1,109.437) 29.49,122.623 29.49,96.249 ; 44.529,15.299 49.669,15.299 ; 44.529,52.178 49.669,52.178 ; 44.529,89.057 49.669,89.057 ; 49.669,15.3 cw(c56.598,8.299) 53.795,17.742 ; 49.669,52.179 cw(c56.598,45.178) 53.795,54.621 ; 49.669,89.058 cw(c56.598,82.057) 53.795,91.499 ; 49.669,125.936 cw(c56.598,118.936) 53.795,128.378 ; 53.794,17.742 58.288,17.742 ; 53.794,54.621 58.288,54.621 ; 53.794,128.379 58.288,128.379 cw(c47.098,109.437) 64.707,122.623 ; 58.288,54.621 cw(c47.098,35.679) 64.708,48.866 cw(c82.318,35.679) 71.128,54.62 75.622,54.621 ; 58.288,17.742 cw(c47.098,-1.2) 64.708,11.987 ; 59.838,17.742 ccw(c47.098,35.678) 64.708,22.491 ; 69.578,17.742 77.116,17.742 77.116,19.508 87.516,19.508 87.516,17.742 95.056,17.742 ; 69.578,17.742 cw(c82.318,35.678) 64.708,22.491 ; 71.128,17.742 ccw(c82.318,-1.2) 64.708,11.987 ; 71.128,17.742 75.622,17.742 ; 75.621,54.621 cw(c72.818,45.178) 79.747,52.179 ; 75.62,91.499 cw(c72.818,82.057) 79.746,89.058 ; 75.62,128.378 cw(c72.817,118.936) 79.746,125.936 ; 75.621,17.742 cw(c72.818,8.299) 79.747,15.3 ; 75.622,91.5 71.128,91.5 ccw(c82.318,72.558) 64.708,85.745 64.708,59.37 ccw(c82.318,72.557) 69.578,54.621 77.116,54.621 77.116,56.387 87.516,56.387 87.516,54.621 95.056,54.621 ccw(c82.316,72.557) 99.925,59.37 ; 75.621,128.379 71.127,128.379 ccw(c82.317,109.437) 64.707,122.623 ; 79.747,15.299 84.887,15.299 ; 79.747,52.178 84.887,52.178 ; 79.747,89.057 84.887,89.057 ; 79.746,125.936 84.886,125.936 ; 84.887,89.058 cw(c91.816,82.057) 89.013,91.499 ; 84.886,125.936 cw(c91.815,118.936) 89.012,128.378 ; 84.887,15.3 cw(c91.816,8.299) 89.013,17.742 ; 84.887,52.179 cw(c91.816,45.178) 89.013,54.621 93.506,54.621 cw(c82.316,35.679) 99.926,48.866 cw(c117.536,35.679) 106.346,54.62 110.84,54.621 ; 89.012,91.5 93.506,91.5 cw(c82.316,72.558) 99.925,85.745 ; 89.011,128.379 93.505,128.379 cw(c82.315,109.437) 99.925,122.623 ; 89.012,17.742 93.506,17.742 ; 93.506,17.742 cw(c82.316,-1.2) 99.926,11.987 ; 95.056,17.742 ccw(c82.316,35.678) 99.926,22.491 ; 104.796,17.742 112.334,17.742 112.334,19.508 122.734,19.508 122.734,17.742 130.274,17.742 ; 104.796,17.742 cw(c117.536,35.678) 99.926,22.491 ; 106.346,17.742 ccw(c117.536,-1.2) 99.926,11.987 ; 106.346,17.742 110.84,17.742 ; 110.839,17.742 cw(c108.036,8.299) 114.965,15.3 ; 110.838,54.621 cw(c108.036,45.178) 114.964,52.179 ; 110.838,91.499 cw(c108.035,82.057) 114.964,89.058 ; 110.838,128.378 cw(c108.035,118.936) 114.964,125.936 ; 110.839,91.5 106.345,91.5 ccw(c117.535,72.558) 99.925,85.745 ; 110.839,128.379 106.345,128.379 ccw(c117.535,109.437) 99.925,122.623 ; 114.965,15.299 120.105,15.299 ; 114.965,52.178 120.105,52.178 ; 114.964,89.057 120.104,89.057 ; 114.964,125.936 120.104,125.936 ; 120.105,15.3 cw(c127.034,8.299) 124.231,17.742 ; 120.105,52.179 cw(c127.034,45.178) 124.231,54.621 ; 120.104,89.058 cw(c127.033,82.057) 124.23,91.499 ; 120.104,125.936 cw(c127.033,118.936) 124.23,128.378 ; 124.23,17.742 128.724,17.742 ; 124.23,54.621 128.724,54.621 cw(c117.534,35.679) 135.143,48.866 ; 124.229,91.5 128.723,91.5 ; 124.229,128.379 128.723,128.379 cw(c117.533,109.437) 135.143,122.623 ; 128.723,91.499 cw(c117.533,72.558) 135.143,85.745 135.143,59.37 cw(c117.533,72.557) 130.273,54.621 122.733,54.621 122.733,56.387 112.333,56.387 112.333,54.621 104.795,54.621 cw(c117.535,72.557) 99.926,59.37 ; 128.723,17.742 cw(c117.534,-1.2) 135.144,11.987 135.144,-14.388 cw(c117.534,-1.201) 130.274,-19.137 122.734,-19.137 122.734,-17.371 112.334,-17.371 112.334,-19.137 104.796,-19.137 cw(c117.536,-1.201) 99.926,-14.388 ; 130.273,17.742 ccw(c117.534,35.678) 135.143,22.491 135.144,48.866 ; 135.143,96.249 cw(c117.533,109.436) 130.273,91.5 122.733,91.5 122.733,93.266 112.333,93.266 112.333,91.5 104.795,91.5 cw(c117.535,109.436) 99.925,96.249 ; 135.143,96.249 135.143,122.624 ; 135.144,124.9 135.144,128.379 140.263,128.379 ; 140.153,-19.137 140.153,-14.388 140.153,11.987 140.153,22.491 140.152,48.866 ; 140.152,48.866 140.152,59.37 140.152,85.745 140.152,96.249 140.152,122.624 ; 140.152,122.6 140.152,128.379 ; 29.49,-14.388 ccw(c47.1,-1.201) 34.36,-19.137 41.898,-19.137 41.898,-17.371 52.298,-17.371 52.298,-19.137 59.838,-19.137 ccw(c47.098,-1.201) 64.708,-14.388 ; 29.49,-14.388 29.49,11.987 ; 29.49,11.987 29.49,22.491 ; 29.49,59.37 29.49,85.745 ; 29.49,85.745 29.49,96.249 ; 29.49,96.249 ccw(c47.1,109.436) 34.36,91.5 41.898,91.5 41.898,93.266 52.298,93.266 52.298,91.5 59.838,91.5 ccw(c47.098,109.436) 64.707,96.249 ; 64.708,96.249 ccw(c82.317,109.436) 69.577,91.5 77.115,91.5 77.115,93.266 87.515,93.266 87.515,91.5 95.055,91.5 ccw(c82.315,109.436) 99.925,96.249 ; 64.707,96.249 64.707,122.624 ; 64.708,96.249 64.708,122.624 ; 64.708,-14.388 ccw(c82.318,-1.201) 69.578,-19.137 77.116,-19.137 77.116,-17.371 87.516,-17.371 87.516,-19.137 95.056,-19.137 ccw(c82.316,-1.201) 99.926,-14.388 ; 64.708,-14.388 64.708,11.987 ; 64.708,-14.388 64.708,11.987 ; 64.708,22.491 64.708,48.866 64.708,22.491 ; 99.926,-14.388 99.926,11.987 ; 99.926,-14.388 99.926,11.987 ; 99.926,22.491 99.926,48.866 99.926,22.491 ; 99.925,59.37 99.925,85.745 ; 99.926,59.37 99.926,85.745 ; 99.925,96.249 99.925,122.624 ; 99.925,96.249 99.925,122.624
  lines w0.127: 24.481,128.379 24.481,-19.137 29.49,-19.137 ; 135.144,128.379 135.144,-19.137 140.153,-19.137

## Other copper
TOP:
  region net BAT_GND: -1.559,-0.5 -1.95,-0.5 -2.15,-0.7 -2.15,-1
  region net CTL: 1.45,-5.2 1.45,-6.4 1.25,-6.6 -0.6,-6.6 -0.8,-6.4 -0.8,-5.2 -0.6,-5 1.25,-5
  region net N479627: 9,6.6 9,3.75 9.25,3.5 11.6,3.5 11.8,3.7 11.8,6.6 11.6,6.8 9.2,6.8
  region net U8_CDT: 3.4,-8.5 3.15,-8.25 3.15,-7.8 3.3,-7.65 4.7,-7.65 4.8,-7.75 4.8,-8.4 4.7,-8.5
  region net U8_CCT: 4.7,-7.45 3.3,-7.45 3.15,-7.3 3.15,-6.6 3.3,-6.45 4.7,-6.45 4.8,-6.55 4.8,-7.35
  region net BAT_GND: -1.5,-1.45 -0.85,-0.8 1.2,-0.8 1.4,-0.6 1.4,-0.25 -1.4,-0.25 -2.15,-1 -2.15,-1.3 -2,-1.45
  region net V3: 4.883,-12.056 4.883,-15.617 4.5,-16 -3.7,-16 -4.017,-15.683 -4.017,-12.096 -3.637,-11.716 4.543,-11.716
  region net BAT_GND: -1.636,2.95 -2.45,2.95 -2.85,3.35 -2.85,3.9
  text "MAKE" at 28.25,123.619 h1.5 r180
  text "MAKE" at 138.913,123.619 h1.5 r180
  text "MAKE" at 25.721,-14.377 h1.5
  text "MAKE" at 25.721,-14.377 h1.5
  text "MAKE" at 136.384,-14.377 h1.5
BOTTOM:
  rectangle net N1341189: -3.6,5.4 0.7,6.65
  rectangle net BAT+: 6.9,1.85 12.35,3.85
  region net U8_VSS: 10.1,-11.45 9.4,-11.45 9.2,-11.65 9.2,-13.6 8.75,-14.05 6.6,-14.05 6.3,-14.35 6.3,-15.25 6.9,-15.85 11.55,-15.85 11.7,-15.7 11.7,-14.95 11.55,-14.8 10.9,-14.8 10.35,-14.25 10.35,-11.7
  region net +3.3V: -10.6,-0.9 -10.6,-1.8 -10.5,-1.9 -10,-1.9 -9.8,-2.1 -9.6,-2.1 -9.6,-2.9 -10.7,-2.9 -10.8,-2.8 -10.8,-0.9
  region net N479603: 5.5,9 6.8,9 7,8.8 7,8.5 7.7,7.8 7.7,5.1 7.5,4.9 5.8,4.9 5.6,5.1 5.6,7.2 5.3,7.5 5.3,8.8
  region net N479627: 11,8.5 11.1,8.4 11.1,7.2 11.3,7 12.4,7 12.6,6.8 12.6,5.1 12.4,4.9 8.6,4.9 8.4,5.1 8.4,8.1 8.8,8.5
  region net N479651: 7.4,9.4 8.5,9.4 8.7,9.2 12.4,9.2 12.6,9 12.6,7.4 12.4,7.2 11.5,7.2 11.3,7.4 11.3,8.5 11.1,8.7 8.7,8.7 8.5,8.5 7.4,8.5 7.3,8.6 7.3,9.3
  region net N479471: 3.5,10.2 3.7,10.4 12.4,10.4 12.6,10.2 12.6,9.6 12.4,9.4 8.9,9.4 8.6,9.7 7.2,9.7 6.8,9.3 5.2,9.3 5,9.1 5,8.1 4.8,7.9 3.7,7.9 3.5,8.1
  region net "PWM MOTO": 0.1,8.6 0.3,8.8 2.6,8.8 2.8,8.6 2.8,7.6 2.5,7.3 0.3,7.3 0.1,7.5
  region net BAT_GND: -1.8,7.05 -0.55,7.05 -0.2,7.4 -0.2,8.7 0.1,9 2.6,9 2.8,9.2 2.8,10.2 2.6,10.4 0,10.4 -1.2,9.2 -1.8,9.2 -2.15,8.85 -2.15,7.4
  region net BAT_GND: -0.9,-0.25 -0.9,-1 -1.2,-1.3 -1.2,-4.15 -1.15,-4.2 0.55,-4.2 0.7,-4.05 0.7,-1.95 0.75,-1.9 1.55,-1.9 1.6,-1.95 1.6,-4.5 1.45,-4.65 -1.55,-4.65 -2.15,-4.05 -2.15,-0.25 -1.95,-0.05 -1.1,-0.05
  region net N1341041: 4,1.3 3,1.3 2.85,1.15 2.85,-0.8 3,-0.95 5.1,-0.95 5.2,-0.85 5.2,-0.2 5.05,-0.05 4.25,-0.05 4,0.2
  region net N1340945: 3.05,1.8 2.8,2.05 2.8,7 3.3,7.5 4.8,7.5 5.3,7 5.3,5 5.6,4.7 6,4.7 6.15,4.55 6.15,1.9 6.05,1.8
  region net +5VSB: -8.05,-8.75 -7.85,-8.55 -6.9,-8.55 -6.75,-8.45 -6.75,-7.3 -6.6,-7.15 -6.25,-7.15 -6.1,-7.3 -6.1,-9.5 -6.35,-9.75 -8.15,-9.75 -8.3,-9.6 -10.05,-9.6 -10.2,-9.45 -10.2,-8.75 -10.05,-8.6 -9.1,-8.6 -8.95,-8.75
  region net BAT+: 12.95,4.7 13.1,4.55 13.1,1.9 13,1.8 6.7,1.8 6.6,1.9 6.6,4.55 6.75,4.7
  region net N478432: -8.3,-0.75 -5,-0.75 -4.8,-0.55 -4.8,0.75 -5.1,1.05 -8.3,1.05 -8.5,0.85 -8.5,-0.55

## Silkscreen, mask and mechanical layers (free items; w line width, h text height)
Top Overlay:
  region: 1.25,-8.6 1.25,-4.95 -0.65,-4.95 -0.65,-8.6
  rectangle: -5.9,-8.3 -1.45,-5.2
  rectangle: -4.95,-3.25 4.95,0.75
  rectangle: -0.2,10.2 0.8,11.6
  lines w0.1: -16.315,-6.8 -16.315,6.503 -8.8,6.503 -8.8,-6.8 -16.315,-6.8
  text "REV0.2" at -11.4,1.35 h0.9 r90
  text "DSV1-002" at -14.25,-6.15 h1.6 r90
  text "RD-BS001-601" at -12.7,-6.2 h0.9 r90
  text "20230331" at -11.35,-6.2 h0.9 r90
Bottom Overlay:
  lines w0.1: -18.11,-13.229 -16.802,-11.921 ; -18.11,-12.556 -17.475,-11.921 ; -18.11,-1.779 -14.296,2.035 ; -18.11,-1.106 -14.736,2.268 ; -18.11,-0.432 -15.261,2.417 ; -18.11,0.241 -15.902,2.449 ; -18.11,0.915 -16.576,2.449 ; -18.11,1.588 -17.249,2.449 ; -18.11,2.262 -17.923,2.449 ; -18.108,-2.451 -13.927,1.731 ; -17.695,-13.487 -16.128,-11.921 ; -17.435,-2.451 -13.623,1.361 ; -17.022,-13.487 -15.71,-12.176 ; -16.761,-2.451 -13.39,0.92 ; -16.348,-13.487 -15.71,-12.85 ; -16.088,-2.451 -13.242,0.395 ; -15.4,-2.437 -13.224,-0.261 ; -15.068,16.71 cw(c0.001,0.001) -13.842,17.739 ; -15.067,16.71 -13.567,14.923 -12.342,15.951 -13.842,17.739 ; -14.78,16.368 -13.645,17.504 ; -14.473,16.002 -13.337,17.138 ; -14.378,-2.088 -13.573,-1.283 ; -14.166,15.636 -13.03,16.771 ; -13.858,15.27 -12.723,16.405 ; -13.348,15.107 -12.415,16.039 ; -12.001,-8.25 -12.001,-5.55 ; -12.001,3.6 -12.001,4.9 ; -10.508,-11.367 ccw(c-8.5,-8.5) -8.5,-12 -4.4,-12 ; -7,15.85 -6.55,16.3 ; -6.1,15.85 -6.55,16.3 ; -5.202,-15.811 -4.361,-14.971 ; -5.202,-15.138 -5.035,-14.971 ; -5.085,-16.368 -3.688,-14.971 ; -4.412,-16.368 -3.014,-14.971 ; -3.738,-16.368 -2.801,-15.431 ; -3.401,13.604 -1.801,15.204 ; -3.401,14.277 -1.801,15.877 ; -3.401,14.951 -2.078,16.274 ; -3.401,15.624 -2.407,16.618 ; -3.401,16.298 -2.856,16.843 ; -3.388,12.943 -1.801,14.53 ; -3.15,4.1 -3.15,3.4 -1.95,4.6 -1.95,5.03 -1.95,12.1 -2.3,12.45 -3.9,12.45 -6.55,15.1 -6.55,16.3 ; -3.065,-16.368 -2.801,-16.105 ; -2.714,12.943 -1.801,13.857 ; -2.041,12.943 -1.801,13.183 ; -2,-12 -0.95,-12 ; -1.4,11.999 8.499,11.999 cw(c8.499,8.499) 11.53,10.249 ; 1.799,13.416 3.399,15.016 ; 1.799,14.089 3.399,15.689 ; 1.799,14.763 3.399,16.363 ; 1.799,15.436 3.206,16.843 ; 2,12.943 3.399,14.342 ; 2.674,12.943 3.399,13.669 ; 2.799,-15.893 3.721,-14.971 ; 2.799,-15.219 3.047,-14.971 ; 2.997,-16.368 4.394,-14.971 ; 3.347,12.943 3.399,12.995 ; 3.671,-16.368 5.068,-14.971 ; 4.344,-16.368 5.198,-15.514 ; 5.018,-16.368 5.198,-16.188 ; 8.499,-12.001 ccw(c8.499,-8.501) 11.999,-8.501 ; 12.382,15.916 14.044,17.578 ; 12.748,15.609 14.414,17.275 ; 13.114,15.301 14.778,16.965 ; 13.21,-0.093 15.753,2.449 ; 13.303,-0.674 16.427,2.449 ; 13.303,0.673 14.985,2.355 ; 13.48,14.994 14.381,15.895 ; 13.497,-1.154 17.1,2.449 ; 13.767,-1.557 17.774,2.449 ; 14.104,-1.894 18.108,2.111 ; 14.508,-2.163 18.108,1.437 ; 14.988,-2.357 18.108,0.764 ; 15.569,-2.449 18.108,0.09 ; 15.708,-13.086 16.874,-11.921 ; 15.708,-12.413 16.201,-11.921 ; 15.981,-13.487 17.548,-11.921 ; 16.241,-2.451 18.108,-0.583 ; 16.654,-13.487 18.108,-12.033 ; 16.915,-2.451 18.108,-1.257 ; 17.328,-13.487 18.108,-12.707 ; 17.588,-2.451 18.108,-1.93 ; 18.001,-13.487 18.108,-13.38 ; 11.999,-8.501 12,0.5 11.999,-8.501 ; -18.11,-13.487 -15.71,-13.487 -15.71,-11.921 -18.11,-11.921 -18.11,-13.487 ; -18.11,-2.451 -15.66,-2.451 ccw(c-15.66,-0.001) -15.66,2.449 -18.11,2.449 -18.11,-2.451 ; -5.202,-16.368 -5.202,-14.971 -2.801,-14.971 -2.801,-16.368 -5.202,-16.368 ; -3.401,12.943 -1.801,12.943 -1.801,15.958 ccw(c-9.5,9.499) -2.64,16.843 -3.401,16.843 -3.401,12.943 ; 1.799,12.943 3.399,12.943 3.399,16.843 2.638,16.843 ccw(c9.498,9.499) 1.799,15.958 1.799,12.943 ; 2.799,-16.368 2.799,-14.971 5.198,-14.971 5.198,-16.368 2.799,-16.368 ; 12.34,15.951 13.565,14.923 15.065,16.71 ccw(c-0.003,0.001) 13.84,17.739 12.34,15.951 ; 15.658,-2.451 cw(c15.658,-0.001) 15.658,2.449 18.108,2.449 18.108,-2.451 15.658,-2.451 ; 15.708,-13.487 15.708,-11.921 18.108,-11.921 18.108,-13.487 15.708,-13.487
Bottom Solder:
  rectangle: -13,0.25 -11.45,1.7

## Dimensions
-17.61,13.187 to 17.608,13.187 on Keep-Out Layer
-0.002,0 to 22.216,22.218 on Keep-Out Layer
-11.19,18.942 to -12.74,-17.937 on Keep-Out Layer